# Altium PCB PCB1.PcbDoc
Units mil, origin at the board's own origin, x right, y up, seen from the top; angles counter-clockwise.
Board outline 1811.02 x 1417.32 mil, 2 copper layers (Top Layer, Bottom Layer); 239 components, 254 nets, 1183 pads, 0 vias.
Unrouted connection lines stored in the file: 797.
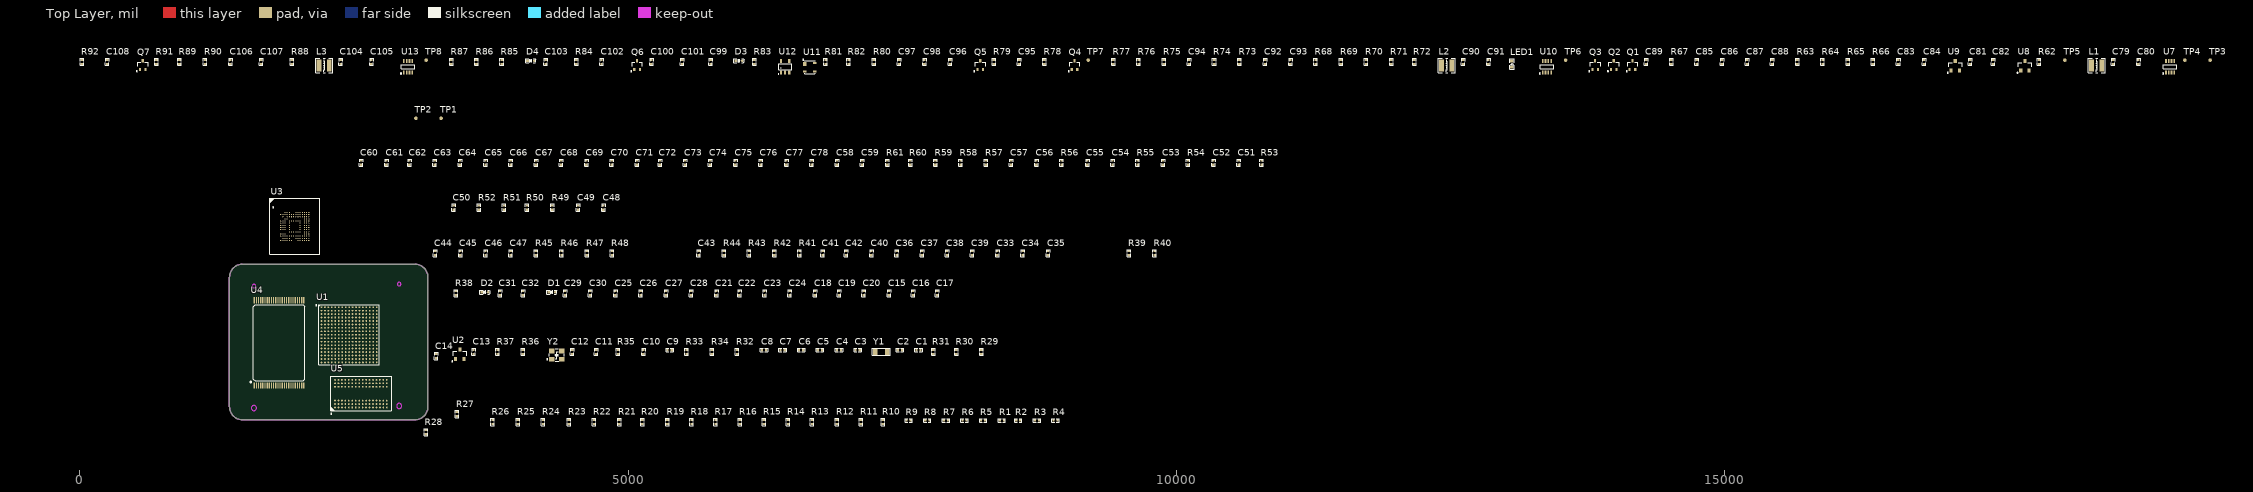
[diagram p0: Top Layer view]
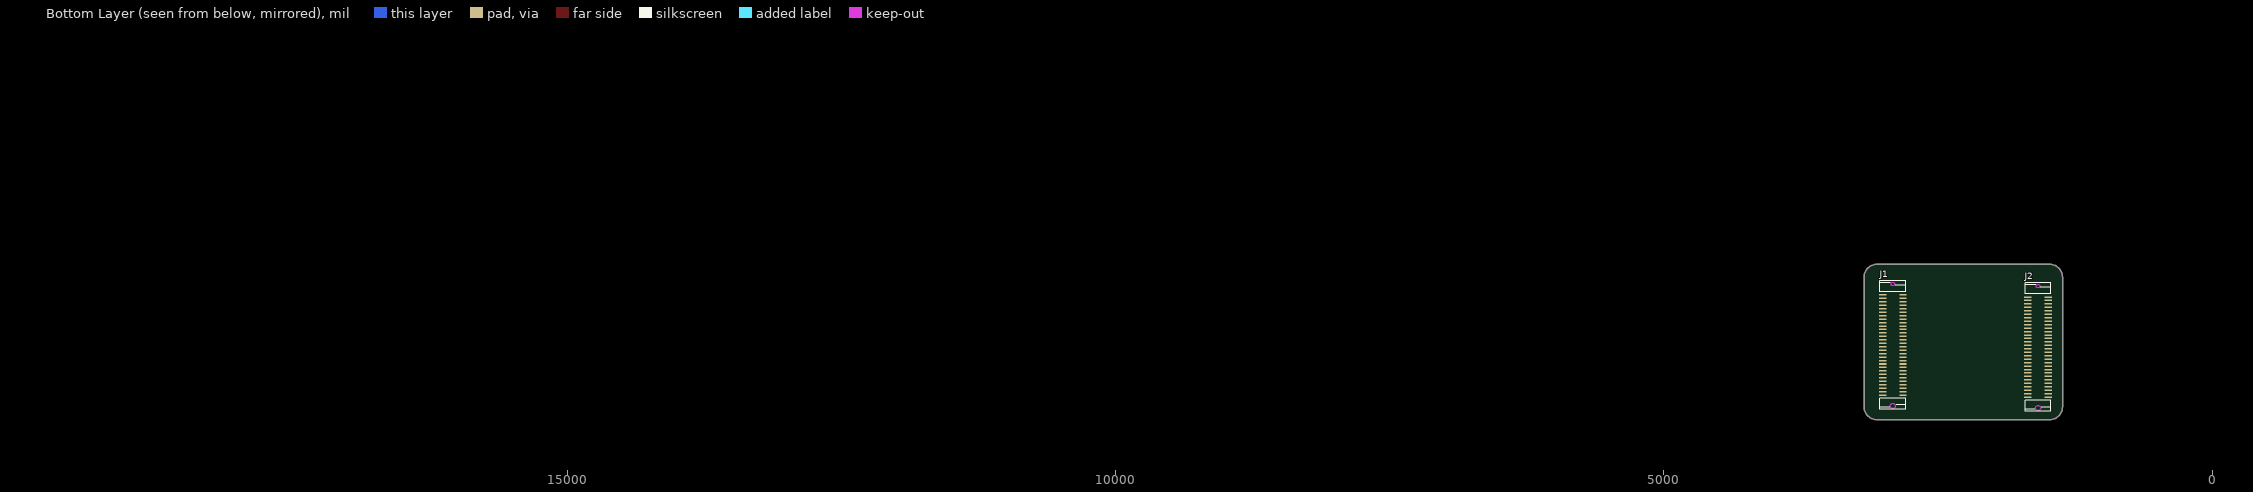
[diagram p1: Bottom Layer view, seen from below]

## Layer stack, top to bottom
Top Solder: solder mask 0.4, Solder Resist, Dk 3.5
Top Layer: signal copper 1.4
Dielectric 1: dielectric 12.6, FR-4, Dk 4.8
Bottom Layer: signal copper 1.4
Bottom Solder: solder mask 0.4, Solder Resist, Dk 3.5

## Board outline
1363.98,1373.11 ccw(c1482.09,1373.11) 1482.09,1255 3056.89,1255 ccw(c3056.89,1373.11) 3175,1373.11 3175,2554.21 ccw(c3056.89,2554.21) 3056.89,2672.32 1482.09,2672.32 ccw(c1482.09,2554.21) 1363.98,2554.21
cut-out: 0,0 10,0 10,10 0,10

## Design rules (kind name [scope] priority, off if disabled: settings)
Clearance [All] p1: gap=10 ignorepadtopadclearanceinfootprint=FALSE except(0: Arc-Hole Track-Hole SMDPad-Hole THPad-Hole Via-Hole Fill-Hole Poly-Hole Region-Hole Text-Hole)
PolygonConnect [All] p1: connectstyle=Relief reliefconductorwidth=10 reliefentries=4 polygonreliefangle="90 Angle" airgapwidth=10
RoutingVias [All] p1: holewidth=28 width=50 viastyle="Through Hole" minholewidth=28 minwidth=50 maxholewidth=28 maxwidth=50
SolderMaskExpansion [All] p1: expansion=4
Width [All] p1: maxlimit=10 minlimit=10 preferedwidth=10
30 further rules are at their usual default settings.

## Classes and differential pairs
component class Sheet8: C79 C80 C81 C82 C83 C84 C85 C86 C87 C88 C89 C90 C91 C92 C93 C94 C95 C96 C97 C98 C99 C100 C101 C102 C103 C104 C105 C106 C107 C108 D3 D4 L1 L2 L3 LED1 Q1 Q2 Q3 Q4 Q5 Q6 Q7 R62 R63 R64 R65 R66 R67 R68 R69 R70 R71 R72 R73 R74 R75 R76 R77 R78 R79 R80 R81 R82 R83 R84 R85 R86 R87 R88 R89 R90 R91 R92 TP3 TP4 TP5 TP6 TP7 TP8 U7 U8 U9 U10 U11 U12 U13
component class Sheet7: J1 J2 TP1 TP2
component class Sheet6: C51 C52 C53 C54 C55 C56 C57 C58 C59 C60 C61 C62 C63 C64 C65 C66 C67 C68 C69 C70 C71 C72 C73 C74 C75 C76 C77 C78 R53 R54 R55 R56 R57 R58 R59 R60 R61 U5
component class Sheet5: C48 C49 C50 R49 R50 R51 R52
component class Sheet4: C33 C34 C35 C36 C37 C38 C39 C40 C41 C42 C43 C44 C45 C46 C47 R39 R40 R41 R42 R43 R44 R45 R46 R47 R48 U3 U4
component class Sheet3: C15 C16 C17 C18 C19 C20 C21 C22 C23 C24 C25 C26 C27 C28 C29 C30 C31 C32 D1 D2 R38 U1
component class Sheet2: C1 C2 C3 C4 C5 C6 C7 C8 C9 C10 C11 C12 C13 C14 R29 R30 R31 R32 R33 R34 R35 R36 R37 U2 Y1 Y2
component class Sheet1: R1 R2 R3 R4 R5 R6 R7 R8 R9 R10 R11 R12 R13 R14 R15 R16 R17 R18 R19 R20 R21 R22 R23 R24 R25 R26 R27 R28

## Components (designator, comment, footprint, x,y, rotation, side; value= is the part's Value field where it differs from the comment)
C1 "224" "C 0402" 7650,1889 r0 top
C2 "18pF" "C 0402" 7480,1889 r0 top
C3 "18pF" "C 0402" 7095,1889 r0 top
C4 "104" "C 0402" 6925,1889 r0 top
C5 "104" "C 0402" 6750,1889 r0 top
C6 "104" "C 0402" 6580,1889 r0 top
C7 "104" "C 0402" 6410,1889 r0 top
C8 "104" "C 0402" 6240,1889 r0 top
C9 "18pF" "C 0402" 5380,1889 r0 top
C10 "104" "C 0402" 5140,1874 r90 top
C11 "18pF" "C 0402" 4710,1874 r90 top
C12 "104" "C 0402" 4490,1874 r90 top
C13 "104" "C 0402" 3590,1874 r90 top
C14 "18pF" "C 0402" 3250,1835 r90 top
C15 "224" "C 0402" 7380,2409 r90 top
C16 "224" "C 0402" 7600,2409 r90 top
C17 "22uF" "C 0402" 7820,2409 r90 top
C18 "22uF" "C 0402" 6705,2409 r90 top
C19 "10uF" "C 0402" 6925,2409 r90 top
C20 "104" "C 0402" 7150,2409 r90 top
C21 "224" "C 0402" 5805,2409 r90 top
C22 "224" "C 0402" 6015,2409 r90 top
C23 "224" "C 0402" 6245,2409 r90 top
C24 "22uF" "C 0402" 6475,2409 r90 top
C25 "224" "C 0402" 4885,2409 r90 top
C26 "10uF" "C 0402" 5115,2409 r90 top
C27 "224" "C 0402" 5345,2409 r90 top
C28 "22uF" "C 0402" 5575,2409 r90 top
C29 "224" "C 0402" 4425,2409 r90 top
C30 "22uF" "C 0402" 4655,2409 r90 top
C31 "224" "C 0402" 3830,2409 r90 top
C32 "224" "C 0402" 4040,2409 r90 top
C33 "10uF" "C 0402" 8370,2774 r90 top
C34 "104" "C 0402" 8600,2774 r90 top
C35 "104" "C 0402" 8830,2774 r90 top
C36 "10uF" "C 0402" 7450,2774 r90 top
C37 "104" "C 0402" 7680,2774 r90 top
C38 "104" "C 0402" 7910,2774 r90 top
C39 "104" "C 0402" 8140,2774 r90 top
C40 "104" "C 0402" 7220,2774 r90 top
C41 "10uF" "C 0402" 6775,2774 r90 top
C42 "104" "C 0402" 6990,2774 r90 top
C43 "104" "C 0402" 5645,2774 r90 top
C44 "10uF" "C 0402" 3240,2774 r90 top
C45 "104" "C 0402" 3470,2774 r90 top
C46 "10uF" "C 0402" 3700,2774 r90 top
C47 "104" "C 0402" 3930,2774 r90 top
C48 "224" "C 0402" 4775,3190 r90 top
C49 "224" "C 0402" 4545,3190 r90 top
C50 "224" "C 0402" 3410,3190 r90 top
C51 "2.2pF" "C 0402" 10570,3600 r90 top
C52 "2.2pF" "C 0402" 10340,3600 r90 top
C53 "224" "C 0402" 9880,3600 r90 top
C54 "224" "C 0402" 9420,3600 r90 top
C55 "104" "C 0402" 9190,3600 r90 top
C56 "22uF" "C 0402" 8725,3600 r90 top
C57 "104" "C 0402" 8495,3600 r90 top
C58 "224" "C 0402" 6905,3600 r90 top
C59 "224" "C 0402" 7135,3600 r90 top
C60 "22uF" "C 0402" 2565,3600 r90 top
C61 "224" "C 0402" 2795,3600 r90 top
C62 "224" "C 0402" 3005,3600 r90 top
C63 "224" "C 0402" 3235,3600 r90 top
C64 "224" "C 0402" 3465,3600 r90 top
C65 "224" "C 0402" 3700,3600 r90 top
C66 "224" "C 0402" 3930,3600 r90 top
C67 "224" "C 0402" 4160,3600 r90 top
C68 "224" "C 0402" 4390,3600 r90 top
C69 "224" "C 0402" 4620,3600 r90 top
C70 "224" "C 0402" 4850,3600 r90 top
C71 "224" "C 0402" 5080,3600 r90 top
C72 "22uF" "C 0402" 5290,3600 r90 top
C73 "224" "C 0402" 5520,3600 r90 top
C74 "224" "C 0402" 5750,3600 r90 top
C75 "224" "C 0402" 5980,3600 r90 top
C76 "224" "C 0402" 6210,3600 r90 top
C77 "224" "C 0402" 6445,3600 r90 top
C78 "224" "C 0402" 6675,3600 r90 top
C79 "104" "C 0402" 18548,4520 r90 top
C80 "22uF" "C 0402" 18778,4520 r90 top
C81 "22uF" "C 0402" 17243,4520 r90 top
C82 "104" "C 0402" 17453,4520 r90 top
C83 "104" "C 0402" 16588,4520 r90 top
C84 "10uF" "C 0402" 16823,4520 r90 top
C85 "104" "C 0402" 14748,4520 r90 top
C86 "22uF" "C 0402" 14978,4520 r90 top
C87 "104" "C 0402" 15208,4520 r90 top
C88 "22uF" "C 0402" 15438,4520 r90 top
C89 "104" "C 0402" 14288,4520 r90 top
C90 "104" "C 0402" 12618,4520 r90 top
C91 "22uF" "C 0402" 12848,4520 r90 top
C92 "22uF" "C 0402" 10813,4520 r90 top
C93 "104" "C 0402" 11043,4520 r90 top
C94 "224" "C 0402" 10118,4520 r90 top
C95 "102" "C 0402" 8568,4520 r90 top
C96 "104" "C 0402" 7938,4520 r90 top
C97 "22uF" "C 0402" 7473,4520 r90 top
C98 "104" "C 0402" 7703,4520 r90 top
C99 "104" "C 0402" 5753,4520 r90 top
C100 "104" "C 0402" 5213,4520 r90 top
C101 "22uF" "C 0402" 5493,4520 r90 top
C102 "104" "C 0402" 4758,4520 r90 top
C103 "224" "C 0402" 4248,4520 r90 top
C104 "104" "C 0402" 2378,4520 r90 top
C105 "22uF" "C 0402" 2658,4520 r90 top
C106 "22uF" "C 0402" 1373,4520 r90 top
C107 "104" "C 0402" 1653,4520 r90 top
C108 "104" "C 0402" 248,4520 r90 top
D1 "RB521S-30" SOD-523 4305,2419 r0 top
D2 "RB521S-30" SOD-523 3695,2419 r0 top
D3 "RB521S-30" SOD-523 6013,4530 r0 top
D4 "RB521S-30" SOD-523 4113,4530 r0 top
J1 "3710M060046G3FT01" 3710F060046G3FT01 2820,2392.91 r180 bottom
J2 "3710M060046G3FT01" 3710F060046G3FT01 1494.96,2373.9 r180 bottom
L1 "2.2uH" NR3015 18398,4485 r0 top
L2 "2.2uH" NR3015 12468,4485 r0 top
L3 "2.2uH" NR3015 2228,4485 r0 top
LED1 "PWR" "LED 0603B" 13063,4500 r90 top
Q1 "2SK3018" SC70-3L 14163,4490 r0 top
Q2 "2SK3018" SC70-3L 13993,4490 r0 top
Q3 "2SK3018" SC70-3L 13823,4490 r0 top
Q4 "2SK3018" SC70-3L 9073,4490 r0 top
Q5 "2SK3018" SC70-3L 8213,4490 r0 top
Q6 "2SK3018" SC70-3L 5083,4490 r0 top
Q7 "2SK3018" SC70-3L 573,4490 r0 top
R1 "47K" "R 0402" 8410,1249 r0 top
R2 "47K" "R 0402" 8560,1249 r0 top
R3 "47K" "R 0402" 8730,1249 r0 top
R4 "47K" "R 0402" 8900,1249 r0 top
R5 "47K" "R 0402" 8240,1249 r0 top
R6 "47K" "R 0402" 8070,1249 r0 top
R7 "47K" "R 0402" 7900,1249 r0 top
R8 "47K" "R 0402" 7730,1249 r0 top
R9 "47K" "R 0402" 7560,1249 r0 top
R10 "47K" "R 0402" 7325,1234 r90 top
R11 "47K" "R 0402" 7125,1234 r90 top
R12 "47K" "R 0402" 6905,1234 r90 top
R13 "47K" "R 0402" 6680,1234 r90 top
R14 "47K" "R 0402" 6460,1234 r90 top
R15 "47K" "R 0402" 6240,1234 r90 top
R16 "47K" "R 0402" 6020,1234 r90 top
R17 "47K" "R 0402" 5800,1234 r90 top
R18 "47K" "R 0402" 5580,1234 r90 top
R19 "47K" "R 0402" 5360,1234 r90 top
R20 "47K" "R 0402" 5130,1234 r90 top
R21 "47K" "R 0402" 4920,1234 r90 top
R22 "47K" "R 0402" 4690,1234 r90 top
R23 "47K" "R 0402" 4460,1234 r90 top
R24 "47K" "R 0402" 4225,1234 r90 top
R25 "47K" "R 0402" 3995,1234 r90 top
R26 "47K" "R 0402" 3765,1234 r90 top
R27 "47K" "R 0402" 3440,1306 r90 top
R28 "47K" "R 0402" 3155,1141 r90 top
R29 "10K" "R 0402" 8225,1874 r90 top
R30 "100K" "R 0402" 7995,1874 r90 top
R31 "10K" "R 0402" 7785,1874 r90 top
R32 "10R" "R 0402" 5995,1874 r90 top
R33 "10K" "R 0402" 5535,1874 r90 top
R34 "10K" "R 0402" 5765,1874 r90 top
R35 "1.5K" "R 0402" 4910,1874 r90 top
R36 "1M" "R 0402" 4040,1874 r90 top
R37 "1.5K" "R 0402" 3810,1874 r90 top
R38 "1.5K" "R 0402" 3430,2409 r90 top
R39 "10K" "R 0402" 9570,2774 r90 top
R40 "10K" "R 0402" 9805,2774 r90 top
R41 "10R" "R 0402" 6565,2774 r90 top
R42 "10R" "R 0402" 6335,2774 r90 top
R43 "10R" "R 0402" 6105,2774 r90 top
R44 "10K" "R 0402" 5875,2774 r90 top
R45 "0R" "R 0402" 4160,2774 r90 top
R46 "10K" "R 0402" 4395,2774 r90 top
R47 "10K" "R 0402" 4625,2774 r90 top
R48 "10K" "R 0402" 4855,2774 r90 top
R49 "10R" "R 0402" 4310,3190 r90 top
R50 "10R" "R 0402" 4080,3190 r90 top
R51 "0R" "R 0402" 3870,3190 r90 top
R52 "10R" "R 0402" 3640,3190 r90 top
R53 "470R" "R 0402" 10780,3600 r90 top
R54 "240R" "R 0402" 10110,3600 r90 top
R55 "240R" "R 0402" 9650,3600 r90 top
R56 "1.5K" "R 0402" 8955,3600 r90 top
R57 "1.5K" "R 0402" 8265,3600 r90 top
R58 "10K" "R 0402" 8035,3600 r90 top
R59 "10K" "R 0402" 7805,3600 r90 top
R60 "10k" "R 0402" 7575,3600 r90 top
R61 "240R" "R 0402" 7365,3600 r90 top
R62 "0R" "R 0402" 17873,4520 r90 top
R63 "130K" "R 0402" 15668,4520 r90 top
R64 "200K" "R 0402" 15898,4520 r90 top
R65 "510K" "R 0402" 16128,4520 r90 top
R66 "50R" "R 0402" 16358,4520 r90 top
R67 "10K" "R 0402" 14518,4520 r90 top
R68 "0R" "R 0402" 11273,4520 r90 top
R69 "470R" "R 0402" 11503,4520 r90 top
R70 "100K" "R 0402" 11733,4520 r90 top
R71 "100K" "R 0402" 11963,4520 r90 top
R72 "100K" "R 0402" 12173,4520 r90 top
R73 "100K" "R 0402" 10578,4520 r90 top
R74 "50R" "R 0402" 10348,4520 r90 top
R75 "10K" "R 0402" 9888,4520 r90 top
R76 "100K" "R 0402" 9658,4520 r90 top
R77 "10K" "R 0402" 9428,4520 r90 top
R78 "22K" "R 0402" 8798,4520 r90 top
R79 "0R" "R 0402" 8338,4520 r90 top
R80 "0R" "R 0402" 7243,4520 r90 top
R81 "300K" "R 0402" 6803,4520 r90 top
R82 "160K" "R 0402" 7013,4520 r90 top
R83 "50R" "R 0402" 6153,4520 r90 top
R84 "130K" "R 0402" 4528,4520 r90 top
R85 "100K" "R 0402" 3848,4520 r90 top
R86 "1M" "R 0402" 3618,4520 r90 top
R87 "0R" "R 0402" 3388,4520 r90 top
R88 "0R" "R 0402" 1933,4520 r90 top
R89 "200K" "R 0402" 908,4520 r90 top
R90 "50R" "R 0402" 1143,4520 r90 top
R91 "10K" "R 0402" 698,4520 r90 top
R92 "160K" "R 0402" 18,4520 r90 top
TP1 "CLK1_P" TP-1.0 3295,4005 r90 top
TP2 "CLK1_N" TP-1.0 3065,4005 r90 top
TP3 "SNVS_3V3" TP-1.0 19433,4535 r90 top
TP4 "SOC_IN" TP-1.0 19203,4535 r90 top
TP5 "VCC_CSI" TP-1.0 18108,4535 r90 top
TP6 "DC3V3" TP-1.0 13553,4535 r90 top
TP7 "VCC_SD" TP-1.0 9198,4535 r90 top
TP8 "VCC_DDR" TP-1.0 3158,4535 r90 top
U1 "MCIMX6Y2CVM05AB" BGA289C80P17X17_1400X1400X132 2455.51,2029.49 r0 top
U2 "NCP803SN293T1G" SOT23-3L 3465,1851.69 r0 top
U3 "KLM8G1GETF" "BGA169  EMMC" 1959.53,3017.95 r0 top
U4 "MT29F4G08ABADAWP-IT" TSOP48 1816.1,1954.76 r90 top
U5 "NT5CC256M16EP-EK" BGA96 2563.23,1492.01 r90 top
U7 "MP2144" SOT23-8L 19068,4475 r0 top
U8 "XC6206-2V8" SOT23-3L 17743,4485 r0 top
U9 "XC6206-3V3" SOT23-3L 17108,4485 r0 top
U10 "MP2144" SOT23-8L 13383,4475 r0 top
U11 "UM805RE" SOT143 6613,4500 r0 top
U12 "UM1750S-00" SOT23-5L 6433,4475 r0 top
U13 "MP2144" SOT23-8L 2993,4475 r0 top
Y1 "32.768KHz" XTAL-3215 7310,1874 r0 top
Y2 "24MHz" XTAL-3225 4350,1844 r0 top

## Footprints (in the part's own frame and the unit in brackets; to place one, negate y for a bottom-side part, rotate by r counter-clockwise, add the part's x,y. Pads: shape width x height; smd on the part's side, far side on the other; paste and mask are expansions set on the pad)
3710F060046G3FT01 [mm]
  rect 1.7x0.35 smd: 1(-4.7,0) 2(-4.7,-0.8) 3(-4.7,-1.6) 4(-4.7,-2.4) 5(-4.7,-3.2) 6(-4.7,-4) 7(-4.7,-4.8) 8(-4.7,-5.6) 9(-4.7,-6.4) 10(-4.7,-7.2) 11(-4.7,-8) 12(-4.7,-8.8) 13(-4.7,-9.6) 14(-4.7,-10.4) 15(-4.7,-11.2) 16(-4.7,-12) 17(-4.7,-12.8) 18(-4.7,-13.6) 19(-4.7,-14.4) 20(-4.7,-15.2) 21(-4.7,-16) 22(-4.7,-16.8) 23(-4.7,-17.6) 24(-4.7,-18.4) 25(-4.7,-19.2) 26(-4.7,-20) 27(-4.7,-20.8) 28(-4.7,-21.6) 29(-4.7,-22.4) 30(-4.7,-23.2) 31(0,-23.2) 32(0,-22.4) 33(0,-21.6) 34(0,-20.8) 35(0,-20) 36(0,-19.2) 37(0,-18.4) 38(0,-17.6) 39(0,-16.8) 40(0,-16) 41(0,-15.2) 42(0,-14.4) 43(0,-13.6) 44(0,-12.8) 45(0,-12) 46(0,-11.2) 47(0,-10.4) 48(0,-9.6) 49(0,-8.8) 50(0,-8) 51(0,-7.2) 52(0,-6.4) 53(0,-5.6) 54(0,-4.8) 55(0,-4) 56(0,-3.2) 57(0,-2.4) 58(0,-1.6) 59(0,-0.8) 60(0,0)
  Keep-Out Layer circle w0.127: c-2.35,2.525 r0.42
  Keep-Out Layer circle w0.127: c-2.35,-25.725 r0.6
  silkscreen extent -5.35,-26.47 0.65,3.27
BGA96 [mm]
  round 0.4 smd: A1(-3.2,6) A2(-2.4,6) A3(-1.6,6) A7(1.6,6) A8(2.4,6) A9(3.2,6) B1(-3.2,5.2) B2(-2.4,5.2) B3(-1.6,5.2) B7(1.6,5.2) B8(2.4,5.2) B9(3.2,5.2) C1(-3.2,4.4) C2(-2.4,4.4) C3(-1.6,4.4) C7(1.6,4.4) C8(2.4,4.4) C9(3.2,4.4) D1(-3.2,3.6) D2(-2.4,3.6) D3(-1.6,3.6) D7(1.6,3.6) D8(2.4,3.6) D9(3.2,3.6) E1(-3.2,2.8) E2(-2.4,2.8) E3(-1.6,2.8) E7(1.6,2.8) E8(2.4,2.8) E9(3.2,2.8) F1(-3.2,2) F2(-2.4,2) F3(-1.6,2) F7(1.6,2) F8(2.4,2) F9(3.2,2) G1(-3.2,1.2) G2(-2.4,1.2) G3(-1.6,1.2) G7(1.6,1.2) G8(2.4,1.2) G9(3.2,1.2) H1(-3.2,0.4) H2(-2.4,0.4) H3(-1.6,0.4) H7(1.6,0.4) H8(2.4,0.4) H9(3.2,0.4) J1(-3.2,-0.4) J2(-2.4,-0.4) J3(-1.6,-0.4) J7(1.6,-0.4) J8(2.4,-0.4) J9(3.2,-0.4) K1(-3.2,-1.2) K2(-2.4,-1.2) K3(-1.6,-1.2) K7(1.6,-1.2) K8(2.4,-1.2) K9(3.2,-1.2) L1(-3.2,-2) L2(-2.4,-2) L3(-1.6,-2) L7(1.6,-2) L8(2.4,-2) L9(3.2,-2) M1(-3.2,-2.8) M2(-2.4,-2.8) M3(-1.6,-2.8) M7(1.6,-2.8) M8(2.4,-2.8) M9(3.2,-2.8) N1(-3.2,-3.6) N2(-2.4,-3.6) N3(-1.6,-3.6) N7(1.6,-3.6) N8(2.4,-3.6) N9(3.2,-3.6) P1(-3.2,-4.4) P2(-2.4,-4.4) P3(-1.6,-4.4) P7(1.6,-4.4) P8(2.4,-4.4) P9(3.2,-4.4) R1(-3.2,-5.2) R2(-2.4,-5.2) R3(-1.6,-5.2) R7(1.6,-5.2) R8(2.4,-5.2) R9(3.2,-5.2) T1(-3.2,-6) T2(-2.4,-6) T3(-1.6,-6) T7(1.6,-6) T8(2.4,-6) T9(3.2,-6)
  silkscreen extent -4.77,-7 4,7, body extent -4,-7 4,7, height 1.2
"BGA169  EMMC" [mm]
  round 0.25 smd: A3(-2.25,3.25) A4(-1.75,3.25) A5(-1.25,3.25) A8(0.25,3.25) A9(0.75,3.25) A10(1.25,3.25) A11(1.75,3.25) A12(2.25,3.25) A13(2.75,3.25) A14(3.25,3.25) B1(-3.25,2.75) B2(-2.75,2.75) B3(-2.25,2.75) B4(-1.75,2.75) B5(-1.25,2.75) B6(-0.75,2.75) B7(-0.25,2.75) B8(0.25,2.75) B9(0.75,2.75) B10(1.25,2.75) B11(1.75,2.75) B12(2.25,2.75) B13(2.75,2.75) B14(3.25,2.75) C2(-2.75,2.25) C4(-1.75,2.25) C5(-1.25,2.25) C6(-0.75,2.25) C7(-0.25,2.25) C8(0.25,2.25) C9(0.75,2.25) C10(1.25,2.25) C11(1.75,2.25) C12(2.25,2.25) C13(2.75,2.25) C14(3.25,2.25) D3(-2.25,1.75) D4(-1.75,1.75) D12(2.25,1.75) D13(2.75,1.75) D14(3.25,1.75) E1(-3.25,1.25) E2(-2.75,1.25) E3(-2.25,1.25) E5(-1.25,1.25) E6(-0.75,1.25) E7(-0.25,1.25) E8(0.25,1.25) E9(0.75,1.25) E10(1.25,1.25) E12(2.25,1.25) E13(2.75,1.25) E14(3.25,1.25) F1(-3.25,0.75) F2(-2.75,0.75) F3(-2.25,0.75) F5(-1.25,0.75) F10(1.25,0.75) F12(2.25,0.75) F13(2.75,0.75) F14(3.25,0.75) G1(-3.25,0.25) G2(-2.75,0.25) G3(-2.25,0.25) G5(-1.25,0.25) G10(1.25,0.25) G12(2.25,0.25) G13(2.75,0.25) G14(3.25,0.25) H1(-3.25,-0.25) H2(-2.75,-0.25) H3(-2.25,-0.25) H5(-1.25,-0.25) H10(1.25,-0.25) H12(2.25,-0.25) H13(2.75,-0.25) H14(3.25,-0.25) J1(-3.25,-0.75) J2(-2.75,-0.75) J3(-2.25,-0.75) J5(-1.25,-0.75) J10(1.25,-0.75) J12(2.25,-0.75) J13(2.75,-0.75) J14(3.25,-0.75) K5(-1.25,-1.25) K6(-0.75,-1.25) K7(-0.25,-1.25) K8(0.25,-1.25) K9(0.75,-1.25) K10(1.25,-1.25) K12(2.25,-1.25) K13(2.75,-1.25) K14(3.25,-1.25) L1(-3.25,-1.75) L2(-2.75,-1.75) L3(-2.25,-1.75) L12(2.25,-1.75) L13(2.75,-1.75) L14(3.25,-1.75) M1(-3.25,-2.25) M2(-2.75,-2.25) M3(-2.25,-2.25) M4(-1.75,-2.25) M5(-1.25,-2.25) M6(-0.75,-2.25) M7(-0.25,-2.25) M8(0.25,-2.25) M9(0.75,-2.25) M10(1.25,-2.25) M11(1.75,-2.25) M12(2.25,-2.25) M13(2.75,-2.25) M14(3.25,-2.25) N2(-2.75,-2.75) N3(-2.25,-2.75) N4(-1.75,-2.75) N5(-1.25,-2.75) N8(0.25,-2.75) N9(0.75,-2.75) N10(1.25,-2.75) N11(1.75,-2.75) N12(2.25,-2.75) N13(2.75,-2.75) N14(3.25,-2.75) P1(-3.25,-3.25) P2(-2.75,-3.25) P3(-2.25,-3.25) P4(-1.75,-3.25) P5(-1.25,-3.25) P6(-0.75,-3.25) P9(0.75,-3.25) P10(1.25,-3.25) P11(1.75,-3.25) P12(2.25,-3.25) P13(2.75,-3.25) P14(3.25,-3.25)
  silkscreen extent -5.75,-6.5 5.75,6.5
BGA289C80P17X17_1400X1400X132 [mm]
  round 0.4 smd: A1(-6.4,6.4) A2(-5.6,6.4) A3(-4.8,6.4) A4(-4,6.4) A5(-3.2,6.4) A6(-2.4,6.4) A7(-1.6,6.4) A8(-0.8,6.4) A9(0,6.4) A10(0.8,6.4) A11(1.6,6.4) A12(2.4,6.4) A13(3.2,6.4) A14(4,6.4) A15(4.8,6.4) A16(5.6,6.4) A17(6.4,6.4) B1(-6.4,5.6) B2(-5.6,5.6) B3(-4.8,5.6) B4(-4,5.6) B5(-3.2,5.6) B6(-2.4,5.6) B7(-1.6,5.6) B8(-0.8,5.6) B9(0,5.6) B10(0.8,5.6) B11(1.6,5.6) B12(2.4,5.6) B13(3.2,5.6) B14(4,5.6) B15(4.8,5.6) B16(5.6,5.6) B17(6.4,5.6) C1(-6.4,4.8) C2(-5.6,4.8) C3(-4.8,4.8) C4(-4,4.8) C5(-3.2,4.8) C6(-2.4,4.8) C7(-1.6,4.8) C8(-0.8,4.8) C9(0,4.8) C10(0.8,4.8) C11(1.6,4.8) C12(2.4,4.8) C13(3.2,4.8) C14(4,4.8) C15(4.8,4.8) C16(5.6,4.8) C17(6.4,4.8) D1(-6.4,4) D2(-5.6,4) D3(-4.8,4) D4(-4,4) D5(-3.2,4) D6(-2.4,4) D7(-1.6,4) D8(-0.8,4) D9(0,4) D10(0.8,4) D11(1.6,4) D12(2.4,4) D13(3.2,4) D14(4,4) D15(4.8,4) D16(5.6,4) D17(6.4,4) E1(-6.4,3.2) E2(-5.6,3.2) E3(-4.8,3.2) E4(-4,3.2) E5(-3.2,3.2) E6(-2.4,3.2) E7(-1.6,3.2) E8(-0.8,3.2) E9(0,3.2) E10(0.8,3.2) E11(1.6,3.2) E12(2.4,3.2) E13(3.2,3.2) E14(4,3.2) E15(4.8,3.2) E16(5.6,3.2) E17(6.4,3.2) F1(-6.4,2.4) F2(-5.6,2.4) F3(-4.8,2.4) F4(-4,2.4) F5(-3.2,2.4) F6(-2.4,2.4) F7(-1.6,2.4) F8(-0.8,2.4) F9(0,2.4) F10(0.8,2.4) F11(1.6,2.4) F12(2.4,2.4) F13(3.2,2.4) F14(4,2.4) F15(4.8,2.4) F16(5.6,2.4) F17(6.4,2.4) G1(-6.4,1.6) G2(-5.6,1.6) G3(-4.8,1.6) G4(-4,1.6) G5(-3.2,1.6) G6(-2.4,1.6) G7(-1.6,1.6) G8(-0.8,1.6) G9(0,1.6) G10(0.8,1.6) G11(1.6,1.6) G12(2.4,1.6) G13(3.2,1.6) G14(4,1.6) G15(4.8,1.6) G16(5.6,1.6) G17(6.4,1.6) H1(-6.4,0.8) H2(-5.6,0.8) H3(-4.8,0.8) H4(-4,0.8) H5(-3.2,0.8) H6(-2.4,0.8) H7(-1.6,0.8) H8(-0.8,0.8) H9(0,0.8) H10(0.8,0.8) H11(1.6,0.8) H12(2.4,0.8) H13(3.2,0.8) H14(4,0.8) H15(4.8,0.8) H16(5.6,0.8) H17(6.4,0.8) J1(-6.4,0) J2(-5.6,0) J3(-4.8,0) J4(-4,0) J5(-3.2,0) J6(-2.4,0) J7(-1.6,0) J8(-0.8,0) J9(0,0) J10(0.8,0) J11(1.6,0) J12(2.4,0) J13(3.2,0) J14(4,0) J15(4.8,0) J16(5.6,0) J17(6.4,0) K1(-6.4,-0.8) K2(-5.6,-0.8) K3(-4.8,-0.8) K4(-4,-0.8) K5(-3.2,-0.8) K6(-2.4,-0.8) K7(-1.6,-0.8) K8(-0.8,-0.8) K9(0,-0.8) K10(0.8,-0.8) K11(1.6,-0.8) K12(2.4,-0.8) K13(3.2,-0.8) K14(4,-0.8) K15(4.8,-0.8) K16(5.6,-0.8) K17(6.4,-0.8) L1(-6.4,-1.6) L2(-5.6,-1.6) L3(-4.8,-1.6) L4(-4,-1.6) L5(-3.2,-1.6) L6(-2.4,-1.6) L7(-1.6,-1.6) L8(-0.8,-1.6) L9(0,-1.6) L10(0.8,-1.6) L11(1.6,-1.6) L12(2.4,-1.6) L13(3.2,-1.6) L14(4,-1.6) L15(4.8,-1.6) L16(5.6,-1.6) L17(6.4,-1.6) M1(-6.4,-2.4) M2(-5.6,-2.4) M3(-4.8,-2.4) M4(-4,-2.4) M5(-3.2,-2.4) M6(-2.4,-2.4) M7(-1.6,-2.4) M8(-0.8,-2.4) M9(0,-2.4) M10(0.8,-2.4) M11(1.6,-2.4) M12(2.4,-2.4) M13(3.2,-2.4) M14(4,-2.4) M15(4.8,-2.4) M16(5.6,-2.4) M17(6.4,-2.4) N1(-6.4,-3.2) N2(-5.6,-3.2) N3(-4.8,-3.2) N4(-4,-3.2) N5(-3.2,-3.2) N6(-2.4,-3.2) N7(-1.6,-3.2) N8(-0.8,-3.2) N9(0,-3.2) N10(0.8,-3.2) N11(1.6,-3.2) N12(2.4,-3.2) N13(3.2,-3.2) N14(4,-3.2) N15(4.8,-3.2) N16(5.6,-3.2) N17(6.4,-3.2) P1(-6.4,-4) P2(-5.6,-4) P3(-4.8,-4) P4(-4,-4) P5(-3.2,-4) P6(-2.4,-4) P7(-1.6,-4) P8(-0.8,-4) P9(0,-4) P10(0.8,-4) P11(1.6,-4) P12(2.4,-4) P13(3.2,-4) P14(4,-4) P15(4.8,-4) P16(5.6,-4) P17(6.4,-4) R1(-6.4,-4.8) R2(-5.6,-4.8) R3(-4.8,-4.8) R4(-4,-4.8) R5(-3.2,-4.8) R6(-2.4,-4.8) R7(-1.6,-4.8) R8(-0.8,-4.8) R9(0,-4.8) R10(0.8,-4.8) R11(1.6,-4.8) R12(2.4,-4.8) R13(3.2,-4.8) R14(4,-4.8) R15(4.8,-4.8) R16(5.6,-4.8) R17(6.4,-4.8) T1(-6.4,-5.6) T2(-5.6,-5.6) T3(-4.8,-5.6) T4(-4,-5.6) T5(-3.2,-5.6) T6(-2.4,-5.6) T7(-1.6,-5.6) T8(-0.8,-5.6) T9(0,-5.6) T10(0.8,-5.6) T11(1.6,-5.6) T12(2.4,-5.6) T13(3.2,-5.6) T14(4,-5.6) T15(4.8,-5.6) T16(5.6,-5.6) T17(6.4,-5.6) U1(-6.4,-6.4) U2(-5.6,-6.4) U3(-4.8,-6.4) U4(-4,-6.4) U5(-3.2,-6.4) U6(-2.4,-6.4) U7(-1.6,-6.4) U8(-0.8,-6.4) U9(0,-6.4) U10(0.8,-6.4) U11(1.6,-6.4) U12(2.4,-6.4) U13(3.2,-6.4) U14(4,-6.4) U15(4.8,-6.4) U16(5.6,-6.4) U17(6.4,-6.4)
  silkscreen extent -7.77,-7 7,7, body extent -7,-7 7,7, height 1.32
"C 0402" [mil]
  rect 20x22 smd: 1(-19,0) 2(19,0)
  silkscreen extent -33,-16 33,16, body extent -20,-10 20,10, height 20
"LED 0603B" [mil]
  rect 30x30 smd: 1(-27,0) 2(27.5,-0.06)
  silkscreen extent -48,-20 48,20, body extent -31,-16 32,16, height 24
NR3015 [mm]
  rect 1.1x2.8 smd: 1(-1.2,0) 2(1.2,0)
  silkscreen extent -1.98,-1.65 1.98,1.65, body extent -1.5,-1.5 1.5,1.5, height 1.45
"R 0402" [mil]
  rect 20x23.62 smd mask+2: 1(-19,0) 2(19,0)
  silkscreen extent -33,-16 33,16, body extent -20,-10 20,10, height 12
SC70-3L [mm]
  rect 0.5x0.7 smd: 1(0.65,-1) 2(-0.65,-1) 3(0,1)
  silkscreen extent -1.47,-1.55 1.24,0.71, body extent -1.09,-1.15 1.11,1.1, height 1.1
SOD-523 [mm]
  rect 0.6x0.6 smd: 1(-0.762,0)
  oct 0.6x0.6 smd: 2(0.762,0)
  silkscreen extent -1.19,-0.48 1.19,0.48, body extent -0.8,-0.4 0.8,0.4, height 0.65
SOT23-3L [mm]
  rect 0.7x0.9 smd: 1(-0.95,-1.1) 2(0.95,-1.1) 3(0,1.1)
  silkscreen extent -1.82,-1.78 1.5,0.71, body extent -1.5,-1.19 1.5,1.21, height 1.05
SOT23-5L [mm]
  rect 0.5x0.9 smd: 1(-0.95,-1.3) 2(0,-1.3) 3(0.95,-1.3) 4(0.95,1.3) 5(-0.95,1.3)
  silkscreen extent -1.6,-1.73 1.5,0.66, body extent -1.5,-1.4 1.5,1.4, height 1.15
SOT23-8L [mm]
  rect 0.4x0.9 smd: 1(-0.975,-1.3) 2(-0.325,-1.3) 3(0.325,-1.3) 4(0.975,-1.3) 5(0.975,1.3) 6(0.325,1.3) 7(-0.325,1.3) 8(-0.975,1.3)
  silkscreen extent -1.75,-1.7 1.55,0.51, body extent -1.5,-1.4 1.5,1.4, height 1.15
SOT143 [mm]
  rect 0.8x0.9 smd: 1(0,0)
  rect 0.8x0.5 smd: 2(0,-1.72) 3(2.3,-1.72) 4(2.3,0.2)
  silkscreen extent -0.51,-2.29 2.29,1.14
TP-1.0 [mm]
  round 0.8 smd: 1(0,0)
TSOP48 [mm]
  rect 1.4x0.28 smd: 1(-9.9,5.75) 2(-9.9,5.25) 3(-9.9,4.75) 4(-9.9,4.25) 5(-9.9,3.75) 6(-9.9,3.25) 7(-9.9,2.75) 8(-9.9,2.25) 9(-9.9,1.75) 10(-9.9,1.25) 11(-9.9,0.75) 12(-9.9,0.25) 13(-9.9,-0.25) 14(-9.9,-0.75) 15(-9.9,-1.25) 16(-9.9,-1.75) 17(-9.9,-2.25) 18(-9.9,-2.75) 19(-9.9,-3.25) 20(-9.9,-3.75) 21(-9.9,-4.25) 22(-9.9,-4.75) 23(-9.9,-5.25) 24(-9.9,-5.75) 25(9.9,-5.75) 26(9.9,-5.25) 27(9.9,-4.75) 28(9.9,-4.25) 29(9.9,-3.75) 30(9.9,-3.25) 31(9.9,-2.75) 32(9.9,-2.25) 33(9.9,-1.75) 34(9.9,-1.25) 35(9.9,-0.75) 36(9.9,-0.25) 37(9.9,0.25) 38(9.9,0.75) 39(9.9,1.25) 40(9.9,1.75) 41(9.9,2.25) 42(9.9,2.75) 43(9.9,3.25) 44(9.9,3.75) 45(9.9,4.25) 46(9.9,4.75) 47(9.9,5.25) 48(9.9,5.75)
  silkscreen extent -9.2,-6 8.8,6.7, body extent -10.07,-6.1 10.13,6.1, height 1.2
XTAL-3215 [mm]
  rect 1x1.4 smd: 1(-1.4,0) 2(1.4,0)
  silkscreen extent -2.06,-0.84 2.06,0.84, body extent -1.6,-0.75 1.6,0.75, height 0.81
XTAL-3225 [mm]
  rect 1.3x1.1 smd: 1(-1.15,-0.95) 2(1.15,-0.95) 3(1.15,0.95) 4(-1.15,0.95)
  silkscreen extent -2.33,-1.45 1.75,1.45, body extent -1.6,-1.24 1.6,1.26, height 0.8

## Part data
C1 C2 C3 C4 C5 C6 C7 C8 C9 C10 C11 C12 C13 C14 C15 C16 C17 C18 C19 C20 C21 C22 C23 C24 C25 C26 C27 C28 C29 C30 C31 C32 C33 C34 C35 C36 C37 C38 C39 C40 C41 C42 C43 C44 C45 C46 C47 C48 C49 C50 C51 C52 C53 C54 C55 C56 C57 C58 C59 C60 C61 C62 C63 C64 C65 C66 C67 C68 C69 C70 C71 C72 C73 C74 C75 C76 C77 C78 C79 C80 C81 C82 C83 C84 C85 C86 C87 C88 C89 C90 C91 C92 C93 C94 C95 C96 C97 C98 C99 C100 C101 C102 C103 C104 C105 C106 C107 C108: library part C
J1 J2: library part 3710F, "3710F060046G3FT01"
L1 L2 L3: library part L
LED1: library part LED-SMD, "贴片LED", BOM名称=贴片, 学习资源=www.ooocke.
Q1 Q2 Q3 Q4 Q5 Q6 Q7: "N沟场效应管  30V,0.1A", BOM名称=N沟场, 学习资源=www.ooocke.
R1 R2 R3 R4 R5 R6 R7 R8 R9 R10 R11 R12 R13 R14 R15 R16 R17 R18 R19 R20 R21 R22 R23 R24 R25 R26 R27 R28 R29 R30 R31 R32 R33 R34 R35 R36 R37 R38 R39 R40 R41 R42 R43 R44 R45 R46 R47 R48 R49 R50 R51 R52 R53 R54 R55 R56 R57 R58 R59 R60 R61 R62 R63 R64 R65 R66 R67 R68 R69 R70 R71 R72 R73 R74 R75 R76 R77 R78 R79 R80 R81 R82 R83 R84 R85 R86 R87 R88 R89 R90 R91 R92: library part R
TP1 TP2 TP3 TP4 TP5 TP6 TP7 TP8: library part TEST-POINT, "测试点"
U3: library part THGBM4G5D1HBAIR/4GB
U4: library part MT29F16G16G08CBACA
U5: library part MT41K256M16TW
U8: library part XC6206-3V3
Y1: library part XTAL, "普通晶振", LatestRevisionDate=17-Jul-2002, LatestRevisionNote="Re-released for DXP Platform.", Published=8-Jun-2000, Publisher="Altium Limited"
Y2: library part XTAL_3225, "3225贴片无源晶振"

## Nets (pads, with @x,y where several pads share a name; then routed paths per layer and width w, separated by ;. In a path a pad name is that pad's centre, name@x,y a point inside that pad or via, vN(x,y) a via of type N, cw(c..) or ccw(c..) an arc to the next point about the centre after c; other vN are vias at no path point)
6D_INT: J1.22 R31.1 U1.P15
ACC_INT: J1.6 U1.R10
AP_INT: J1.49 U1.L15
AUD_INT: J1.3 U1.P9
BEEP: J1.5 U1.R9
BLT_PWM: J1.16 U1.N17
BOOT_MODE0: J1.7 U1.T10
BOOT_MODE1: J1.8 U1.U10
CAN1_RX: J1.35 U1.G14
CAN1_TX: J1.36 U1.H15
CAN2_RX: J1.40 U1.H14
CAN2_TX: J1.39 U1.J15
CLK1_N: TP2.1 U1.P16
CLK1_P: TP1.1 U1.P17
CSI_DATA0: J2.56 U1.E4
CSI_DATA1: J2.57 U1.E3
CSI_DATA2: J2.3 U1.E2
CSI_DATA3: J2.59 U1.E1
CSI_DATA4: J2.55 U1.D4
CSI_DATA5: J2.6 U1.D3
CSI_DATA6: J2.4 U1.D2
CSI_DATA7: J2.58 U1.D1
CSI_HSYNC: J2.1 U1.F3
CSI_MCLK: J2.2 U1.F5
CSI_PIXCLK: J2.5 U1.E5
CSI_PWDN: J1.14 U1.M16
CSI_RESET: J1.13 U1.L14
CSI_VSYNC: J2.60 U1.F2
CT_INT: J1.15 U1.M15
CT_RST: J2.48 U1.R6
DC5V: C79.2 C80.2 C83.2 C85.2 C86.2 C90.2 C91.2 C100.2 C101.2 C104.2 C105.2 J1.1 J1.2 U7.2 U8.2 U9.2 U10.2 U12.1 U13.2
DCDC_3V3_PG: C95.2 R67.1 R79.2 R80.2 R91.1 U12.3
DISCHG_EN: C96.1 Q2.2 Q4.2 Q7.2 R77.2
DRAM_1V35: C55.2 C56.2 C60.2 C61.2 C62.2 C63.2 C64.2 C65.2 C66.2 C67.2 C68.2 C69.2 C70.2 C71.2 C72.2 C73.2 C74.2 C75.2 C76.2 C77.2 C78.2 R56.2 R88.2 U1.G6 U1.H6 U1.J6 U1.K6 U1.L6 U1.M6 U5.A1 U5.A8 U5.B2 U5.C1 U5.C9 U5.D2 U5.D9 U5.E9 U5.F1 U5.G7 U5.H2 U5.H9 U5.K2 U5.K8 U5.N1 U5.N9 U5.R1 U5.R9
DRAM_ADDR0: U1.L5 U5.N3
DRAM_ADDR1: U1.H2 U5.P7
DRAM_ADDR2: U1.K1 U5.P3
DRAM_ADDR3: U1.M2 U5.N2
DRAM_ADDR4: U1.K4 U5.P8
DRAM_ADDR5: U1.L1 U5.P2
DRAM_ADDR6: U1.G2 U5.R8
DRAM_ADDR7: U1.H4 U5.R2
DRAM_ADDR8: U1.J4 U5.T8
DRAM_ADDR9: U1.L2 U5.R3
DRAM_ADDR10: U1.M4 U5.L7
DRAM_ADDR11: U1.K3 U5.R7
DRAM_ADDR12: U1.L4 U5.N7
DRAM_ADDR13: U1.H3 U5.T3
DRAM_ADDR14: U1.G1 U5.T7
DRAM_ADDR15: U1.K5 U5.M7
DRAM_CAS_B: U1.J2 U5.K3
DRAM_CS0_B: U1.N2 U5.L2
DRAM_CS1_B: U1.H5 U5.L1
DRAM_DATA0: U1.T4 U5.E3
DRAM_DATA1: U1.U6 U5.F7
DRAM_DATA2: U1.T6 U5.F2
DRAM_DATA3: U1.U7 U5.F8
DRAM_DATA4: U1.U8 U5.H3
DRAM_DATA5: U1.T8 U5.H8
DRAM_DATA6: U1.T5 U5.G2
DRAM_DATA7: U1.U4 U5.H7
DRAM_DATA8: U1.U2 U5.D7
DRAM_DATA9: U1.U3 U5.C3
DRAM_DATA10: U1.U5 U5.C8
DRAM_DATA11: U1.R4 U5.C2
DRAM_DATA12: U1.P5 U5.A7
DRAM_DATA13: U1.P3 U5.A2
DRAM_DATA14: U1.R2 U5.B8
DRAM_DATA15: U1.R1 U5.A3
DRAM_DQM0: U1.T7 U5.E7
DRAM_DQM1: U1.T3 U5.D3
DRAM_ODT0: U1.N1 U5.K1
DRAM_ODT1: U1.F1 U5.J1
DRAM_RAS_B: U1.M5 U5.J3
DRAM_RESET_B: R60.2 U1.G4 U5.T2
DRAM_SDBA0: U1.M1 U5.M2
DRAM_SDBA1: U1.H1 U5.N8
DRAM_SDBA2: U1.K2 U5.M3
DRAM_SDCKE0: R58.2 U1.M3 U5.K9
DRAM_SDCKE1: R59.2 U1.J3 U5.J9
DRAM_SDCLK0_N: R53.1 U1.P2 U5.K7
DRAM_SDCLK0_P: R53.2 U1.P1 U5.J7
DRAM_SDQS0_N: C51.1 U1.P7 U5.G3
DRAM_SDQS0_P: C51.2 U1.P6 U5.F3
DRAM_SDQS1_N: C52.1 U1.T2 U5.B7
DRAM_SDQS1_P: C52.2 U1.T1 U5.C7
DRAM_SDWE_B: U1.J1 U5.L3
DRAM_VREF: C53.1 C54.1 C59.2 R56.1 R57.2 U1.P4 U5.H1 U5.M8
DRAM_ZQ0: R54.1 U5.L8
DRAM_ZQ1: R55.1 U5.L9
ECSPI3_SCLK: J1.41 U1.J16
ECSPI3_SS0: J1.42 U1.J17
ECSPI4_MISO: J2.31 R52.2
ECSPI4_MOSI: J2.32 U1.B15
ECSPI4_SCLK: J2.35 U1.A16
ECSPI4_SS0: J2.34 U1.D16
EMMC_VDDIM: C41.2 C42.2 U3.C2
ENET1_CRS_DV: J1.25 U1.E16
ENET1_INT_TREE#: J1.11 U1.N8
ENET1_RST: J1.10 U1.N10
ENET1_RXD0: J1.26 U1.F16
ENET1_RXD1: J1.24 U1.E17
ENET1_RXER: J1.30 U1.D15
ENET1_TX_CLK: J1.29 R50.2
ENET1_TXD0: J1.23 U1.E15
ENET1_TXD1: J1.28 U1.E14
ENET1_TXEN: J1.27 U1.F15
ENET2_CRS_DV: J2.33 U1.B17
ENET2_INT_TREE#: J2.39 U1.N11
ENET2_RST: J1.9 U1.N9
ENET2_RXD0: J2.38 U1.C17
ENET2_RXD1: J2.37 U1.C16
ENET2_TXD0: J2.36 U1.A15
ENET_MDC: J1.45 U1.L16
ENET_MDIO: J1.44 U1.K17
GND: C1.2 C2.1 C3.1 C4.1 C5.1 C6.1 C7.1 C8.1 C9.2 C10.1 C11.1 C12.2 C13.1 C14.2 C15.1 C16.1 C17.1 C18.1 C19.1 C20.1 C21.1 C22.1 C23.1 C24.1 C25.1 C26.1 C27.1 C28.1 C29.1 C30.1 C31.1 C32.1 C33.1 C34.1 C35.1 C36.1 C37.1 C38.1 C39.1 C40.2 C41.1 C42.1 C43.2 C44.1 C45.1 C46.1 C47.1 C48.2 C49.2 C50.1 C53.2 C54.2 C56.1 C57.1 C58.1 C59.1 C60.1 C61.1 C62.1 C63.1 C64.1 C65.1 C66.1 C67.1 C68.1 C69.1 C70.1 C71.1 C72.1 C73.1 C74.1 C75.1 C76.1 C77.1 C78.1 C79.1 C80.1 C81.1 C82.1 C83.1 C84.1 C85.1 C86.1 C87.1 C88.1 C89.1 C90.1 C91.1 C92.2 C93.2 C94.2 C95.1 C96.2 C97.1 C98.1 C99.1 C100.1 C101.1 C102.1 C104.1 C105.1 C106.2 C107.2 C108.1 J1.59 J1.60 LED1.2 Q2.1 Q4.1 Q5.1 Q7.1 R5.1 R6.1 R7.1 R8.1 R9.1 R10.1 R11.1 R12.1 R13.1 R14.1 R15.1 R16.1 R17.1 R18.1 R19.1 R20.1 R21.1 R22.1 R23.1 R24.1 R25.1 R26.1 R27.1 R28.1 R29.2 R31.2 R44.1 R54.2 R55.2 R57.1 R58.1 R59.1 R60.1 R61.1 R70.1 R71.1 R72.1 R78.1 R84.1 R85.1 R86.2 R92.1 U1.A1 U1.A17 U1.C3 U1.C7 U1.C11 U1.C15 U1.E8 U1.E11 U1.F6 U1.F7 U1.F8 U1.F9 U1.F10 U1.F11 U1.F12 U1.G3 U1.G5 U1.G7 U1.G12 U1.G15 U1.H7 U1.H12 U1.J5 U1.J7 U1.J12 U1.K7 U1.K12 U1.L3 U1.L7 U1.L12 U1.M7 U1.M8 U1.M9 U1.M10 U1.M11 U1.M12 U1.N3 U1.N5 U1.N7 U1.R3 U1.R5 U1.R7 U1.R11 U1.R16 U1.R17 U1.T14 U1.U1 U1.U14 U1.U17 U2.1 U3.C4 U3.E7 U3.G5 U3.H10 U3.K8 U3.N2 U3.N5 U3.P4 U3.P6 U4.13 U4.25 U4.36 U4.48 U5.A9 U5.B1 U5.B3 U5.B9 U5.D1 U5.D8 U5.E1 U5.E2 U5.E8 U5.F9 U5.G1 U5.G8 U5.G9 U5.J2 U5.J8 U5.M1 U5.M9 U5.P1 U5.P9 U5.T1 U5.T9 U7.4 U7.6 U10.4 U10.6 U11.1 U12.2 U13.4 U13.6 Y2.2 Y2.4
GPIO_0: J1.51 U1.K13
GPIO_3: J1.47 U1.L17
GPIO_5: J2.47 Q6.2 R85.2 U1.M17
GPIO_DVFS: Q3.2 R72.2 U1.P10
HDMI_INT: J1.48 U1.K15
I2C1_SCL: J1.33 U1.G17
I2C1_SDA: J1.34 U1.G16
I2C2_SCL: J1.31 U1.F17
I2C2_SDA: J1.32 U1.G13
JTAG_nTRST: J1.21 U1.N14
JTAG_TCK: J1.19 R29.1 U1.M14
JTAG_TDI: J1.17 U1.N16
JTAG_TDO: J1.18 U1.N15
JTAG_TMS: J1.20 U1.P14
LCD_DATA0: J2.7 R4.2 R5.2 U1.B9
LCD_DATA1: J2.8 R3.2 R6.2 U1.A9
LCD_DATA2: J2.9 R7.2 U1.E10
LCD_DATA3: J2.10 R8.2 U1.D10
LCD_DATA4: J2.11 R9.2 U1.C10
LCD_DATA5: J2.12 R10.2 U1.B10
LCD_DATA6: J2.13 R11.2 U1.A10
LCD_DATA7: J2.14 R12.2 U1.D11
LCD_DATA8: J2.15 R13.2 U1.B11
LCD_DATA9: J2.16 R14.2 U1.A11
LCD_DATA10: J2.17 R15.2 U1.E12
LCD_DATA11: J2.18 R16.2 U1.D12
LCD_DATA12: J2.19 R17.2 U1.C12
LCD_DATA13: J2.20 R2.2 R18.2 U1.B12
LCD_DATA14: J2.21 R1.2 R19.2 U1.A12
LCD_DATA15: J2.22 R20.2 U1.D13
LCD_DATA16: J2.23 R21.2 U1.C13
LCD_DATA17: J2.24 R22.2 U1.B13
LCD_DATA18: J2.25 R23.2 U1.A13
LCD_DATA19: J2.26 R24.2 U1.D14
LCD_DATA20: J2.27 R25.2 U1.C14
LCD_DATA21: J2.28 R26.2 U1.B14
LCD_DATA22: J2.29 R27.2 U1.A14
LCD_DATA23: J2.30 R28.2 U1.B16
LCD_DE: J2.46 U1.B8
LCD_HSYNC: J2.44 U1.D9
LCD_PCLK: J2.45 R49.1
LCD_VSYNC: J2.43 U1.C9
NAND_ALE: R44.2 U1.B4 U3.K5 U4.17
NAND_CE1N: R45.1 R46.1 R47.1 R48.1 U1.B5 U1.C5 U4.4 U4.5 U4.6 U4.7 U4.9 U4.10
NAND_CLE: U1.A4 U4.16
NAND_DATA0: R40.1 U1.D7 U3.A3 U4.29
NAND_DATA1: U1.B7 U3.A4 U4.30
NAND_DATA2: U1.A7 U3.A5 U4.31
NAND_DATA3: U1.D6 U3.B2 U4.32
NAND_DATA4: U1.C6 U3.B3 U4.41
NAND_DATA5: U1.B6 U3.B4 U4.42
NAND_DATA6: U1.A6 U3.B5 U4.43
NAND_DATA7: U1.A5 U3.B6 U4.44
NAND_DQS: R43.2 U4.35
NAND_nRE: R41.2 U3.M6 U4.8
NAND_nREADY: R45.2 U1.A3
NAND_nWE: R39.1 R42.2 U3.M5 U4.18
NAND_nWP: U1.D5 U4.19
NetC2_2: C2.2 U1.T11 Y1.2
NetC3_2: C3.2 U1.U11 Y1.1
NetC12_1: C12.1 R35.2 U2.3
NetC29_2: C29.2 C30.2 U1.P13
NetC32_2: C32.2 U1.N12
NetC55_1: C55.1 C57.2
NetC81_2: C81.2 C82.2 L1.1 R62.1 R63.2 R64.2 R65.2 R66.2 TP4.1 U7.5
NetC89_2: C89.2 R67.2 U7.8
NetC92_1: C92.1 C93.1 L2.1 R68.1 R73.2 R74.2 TP6.1 U10.5
NetC94_1: C94.1 R75.2 U10.8 U11.2
NetC102_2: C102.2 D3.2 R83.1
NetC103_2: C103.2 D4.2 R86.1
NetC106_1: C106.1 C107.1 L3.1 R88.1 R89.2 R90.2 TP8.1 U13.5
NetC108_2: C108.2 R91.2 U13.8
NetD3_1: D3.1 D4.1 U11.3
NetL1_2: L1.2 U7.3
NetL2_2: L2.2 U10.3
NetL3_2: L3.2 U13.3
NetLED1_1: LED1.1 R69.2
NetQ1_1: Q1.1 Q3.1 R63.1 R70.2 U7.7
NetQ1_3: Q1.3 R64.1
NetQ2_3: Q2.3 R66.1
NetQ3_3: Q3.3 R65.1
NetQ4_3: Q4.3 R74.1
NetQ5_3: Q5.3 R76.1 R77.1
NetQ6_1: Q6.1 R81.1 R84.2 U12.4
NetQ6_3: Q6.3 R82.1
NetQ7_3: Q7.3 R90.1
NetR32_2: R32.2 U1.C1
NetR37_1: R37.1 U2.2
NetR41_1: R41.1 U1.D8
NetR42_1: R42.1 U1.C8
NetR43_1: R43.1 U1.E6
NetR49_2: R49.2 U1.A8
NetR50_1: R50.1 U1.F14
NetR51_2: R51.2 U1.E9
NetR52_1: R52.1 U1.D17
NetR73_1: R73.1 R78.2 U10.7
NetR79_1: R79.1 U10.1
NetR89_1: R89.1 R92.2 U13.7
nUSB_OTG_CHD: J1.52 U1.U16
NVCC_3V3: C1.1 C10.2 C33.2 C34.2 C35.2 C36.2 C37.2 C38.2 C39.2 C40.1 C44.2 C45.2 C46.2 C47.2 C48.1 C49.1 C50.2 R1.1 R2.1 R3.1 R4.1 R35.1 R39.2 R40.2 R46.2 R47.2 R48.2 R68.2 R69.1 R80.1 R87.1 U1.E7 U1.E13 U1.F13 U1.H13 U1.J13 U1.L13 U1.M13 U3.C6 U3.E6 U3.F5 U3.J10 U3.K9 U3.M4 U3.N4 U3.P3 U3.P5 U4.12 U4.34 U4.37 U4.39
NVCC_CSI: C43.1 C84.2 TP5.1 U1.F4 U8.1
NVCC_SD: C8.2 C97.2 C98.2 R33.1 R34.1 R81.2 R82.2 TP7.1 U1.C4 U12.5
nWDOG: C103.1 R51.1
ONOFF: J1.4 U1.R8
PERI_PWREN: J1.12 U1.P11
PMIC_ON_REQ: J2.41 Q5.2 R75.1 U1.T9
PMIC_STBY_REQ: Q1.2 R71.2 U1.U9
POR_B: C13.2 R30.2 R37.2 U1.P8
RESET: J2.40 R83.2
SD1_CD: J1.43 U1.J14
SD1_CLK: C9.1 J2.54 R32.1
SD1_CMD: J2.53 R33.2 U1.C2
SD1_DATA0: J2.49 R34.2 U1.B3
SD1_DATA1: J2.50 U1.B2
SD1_DATA2: J2.52 U1.B1
SD1_DATA3: J2.51 U1.A2
UART1_RXD: J1.46 U1.K16
UART1_TXD: J1.50 U1.K14
UART2_CTS_BB: J1.38 U1.H17
UART2_RTS_BB: J1.37 U1.H16
USB_OTG1_DN: J1.53 U1.T15
USB_OTG1_DP: J1.54 U1.U15
USB_OTG1_VBUS: C4.2 J1.57 U1.T12
USB_OTG2_DN: J1.55 U1.T13
USB_OTG2_DP: J1.56 U1.U13
USB_OTG2_VBUS: C7.2 J1.58 U1.U12
VDD_ARM_CAP: C15.2 C16.2 C17.2 U1.G9 U1.G10 U1.G11 U1.H11
VDD_ARM_SOC_IN: C18.2 C19.2 C20.2 R62.2 U1.H9 U1.H10 U1.J9 U1.J10 U1.K9 U1.K10
VDD_COIN_3V: D2.1 J2.42 R38.1
VDD_HIGH_CAP: C27.2 C28.2 C58.2 U1.N6 U1.R14 U1.R15
VDD_HIGH_IN: C25.2 C26.2 R87.2 U1.N13
VDD_SNVS_3V3: C87.2 C88.2 C99.2 D1.1 R76.2 TP3.1 U9.1 U11.4
VDD_SNVS_IN: C31.2 D1.2 D2.2 R30.1 R38.2 U1.P12
VDD_SOC_CAP: C21.2 C22.2 C23.2 C24.2 U1.G8 U1.H8 U1.J8 U1.J11 U1.K8 U1.K11 U1.L8 U1.L9 U1.L10 U1.L11
VDDUSB: C5.2 C6.2 U1.R12
XTALI: C11.2 R36.2 U1.T16 Y2.3
XTALO: C14.1 R36.1 U1.T17 Y2.1
ZQPAD: R61.2 U1.N4
pads on no net: U1.R13 U3.A8 U3.A9 U3.A10 U3.A11 U3.A12 U3.A13 U3.A14 U3.B1 U3.B7 U3.B8 U3.B9 U3.B10 U3.B11 U3.B12 U3.B13 U3.B14 U3.C5 U3.C7 U3.C8 U3.C9 U3.C10 U3.C11 U3.C12 U3.C13 U3.C14 U3.D3 U3.D4 U3.D12 U3.D13 U3.D14 U3.E1 U3.E2 U3.E3 U3.E5 U3.E8 U3.E9 U3.E10 U3.E12 U3.E13 U3.E14 U3.F1 U3.F2 U3.F3 U3.F10 U3.F12 U3.F13 U3.F14 U3.G1 U3.G2 U3.G3 U3.G10 U3.G12 U3.G13 U3.G14 U3.H1 U3.H2 U3.H3 U3.H5 U3.H12 U3.H13 U3.H14 U3.J1 U3.J2 U3.J3 U3.J5 U3.J12 U3.J13 U3.J14 U3.K6 U3.K7 U3.K10 U3.K12 U3.K13 U3.K14 U3.L1 U3.L2 U3.L3 U3.L12 U3.L13 U3.L14 U3.M1 U3.M2 U3.M3 U3.M7 U3.M8 U3.M9 U3.M10 U3.M11 U3.M12 U3.M13 U3.M14 U3.N3 U3.N8 U3.N9 U3.N10 U3.N11 U3.N12 U3.N13 U3.N14 U3.P1 U3.P2 U3.P9 U3.P10 U3.P11 U3.P12 U3.P13 U3.P14 U4.1 U4.2 U4.3 U4.11 U4.14 U4.15 U4.20 U4.21 U4.22 U4.23 U4.24 U4.26 U4.27 U4.28 U4.33 U4.38 U4.40 U4.45 U4.46 U4.47 U7.1 U8.3 U9.3 U13.1

## Keep-outs
Keep-Out Layer:
  the board outline again, w10

## Silkscreen, mask and mechanical layers (free items; w line width, h text height)
Mechanical 15:
  lines w0.1: 2268.49,1964.66 2270.49,1962.66